# Altium PCB 2009_DFMUX_MEZZANINE_REV4_TIMEMAIL.PCBDOC (part 2 of 6)
Units mil, origin at the board's own origin, x right, y up, seen from the top; angles counter-clockwise.
Board outline 4922.86 x 3627.76 mil, 6 copper layers (Top Layer, Internal Plane 1, Mid-Layer 1, Internal Plane 2, Mid-Layer 2, Bottom Layer); 519 components, 606 nets, 2175 pads, 757 vias.
Unrouted connection lines stored in the file: 148.
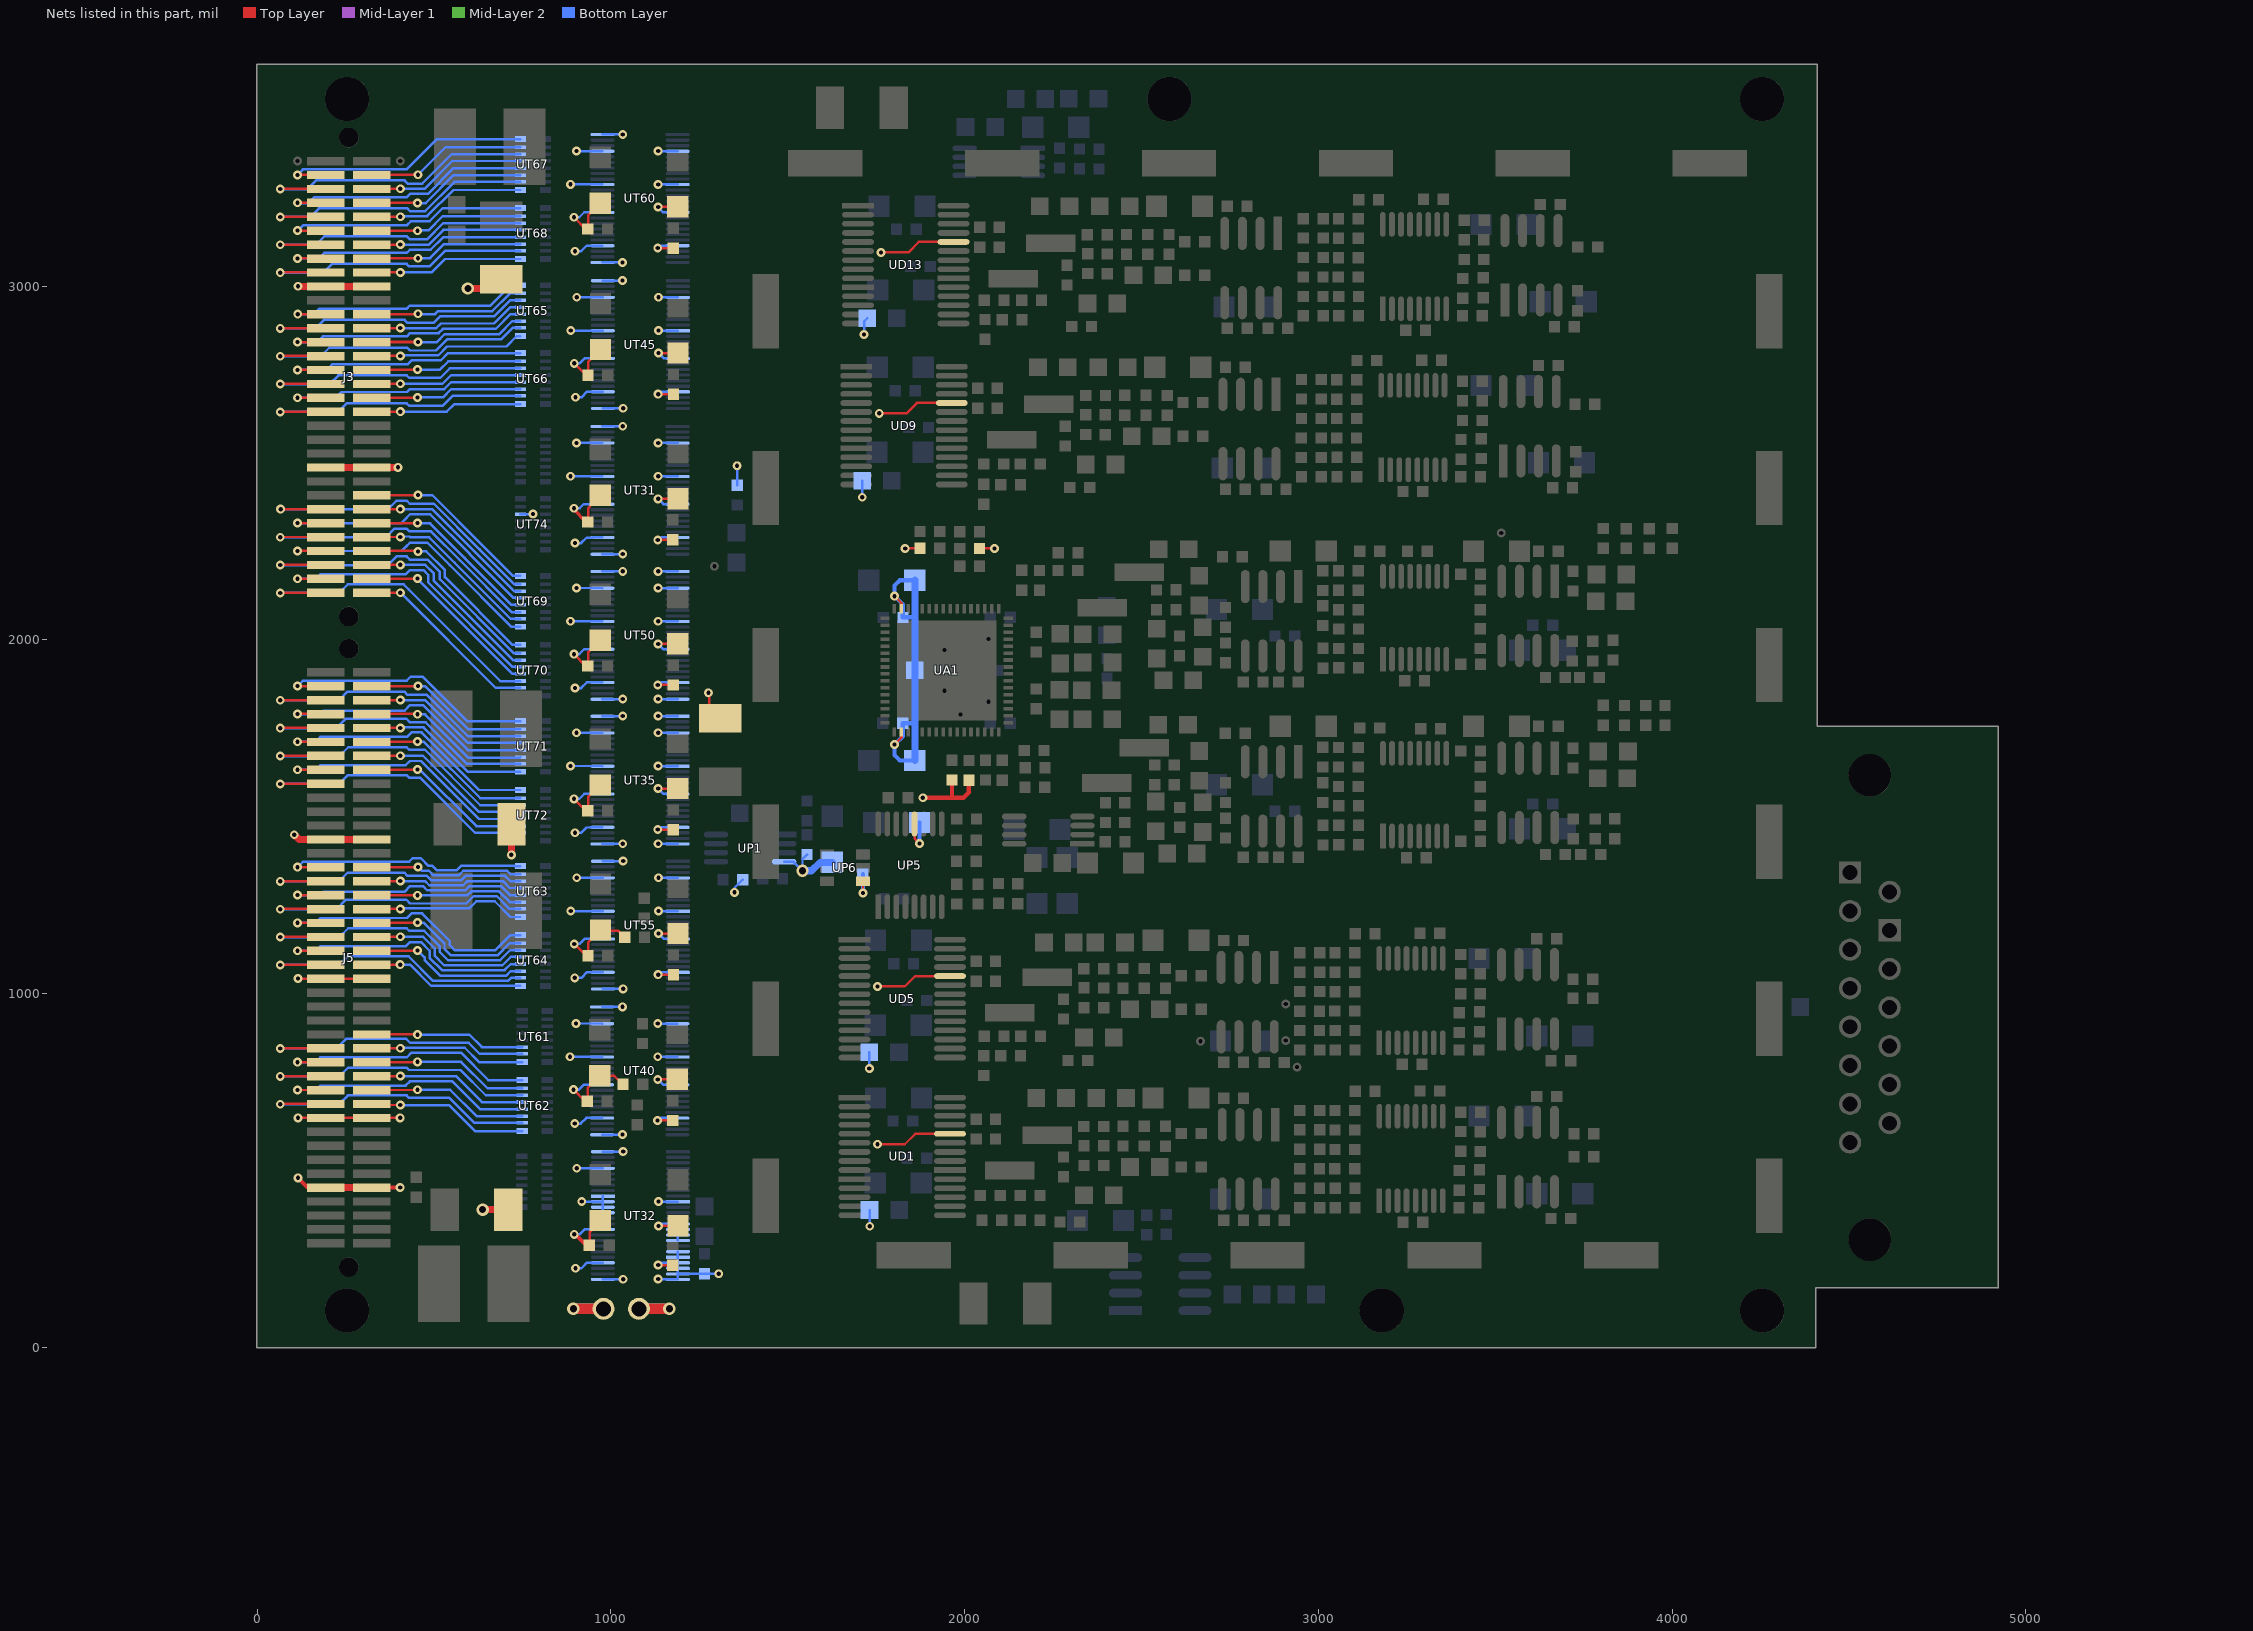
[diagram p6: the nets of this part, all layers, seen from the top]

## Via types
v1: diameter 25, hole 12, Top Layer to Bottom Layer, 692 vias
v2: diameter 40, hole 20, Top Layer to Bottom Layer, 39 vias
v3: diameter 35, hole 20, Top Layer to Bottom Layer, 23 vias
v4: diameter 22, hole 12, Top Layer to Bottom Layer, 3 vias

## Nets (pads, with @x,y where several pads share a name; then routed paths per layer and width w, separated by ;. In a path a pad name is that pad's centre, name@x,y a point inside that pad or via, vN(x,y) a via of type N, cw(c..) or ccw(c..) an arc to the next point about the centre after c; other vN are vias at no path point) (continued)
COMB1_DATA5: J5.54 UT61.11 | length 439.7
  Top Layer w7: J5.54@324.55,884.83 452.67,884.83 v1(453.63,883.87)
  Bottom Layer w7: v1(453.63,883.87) 599.77,883.87 635.27,848.37 UT61.11@749.13,848.37
COMB1_DATA6: J5.55 UT61.10 | length 841.8
  Top Layer w7: v1(65.55,844.7) 66.32,845.47 J5.55@194.63,845.47
  Bottom Layer w7: v1(65.55,844.7) 224.47,844.7 251.63,871.87 421.63,871.87 432.63,860.87 597.77,860.87 629.27,829.37 UT61.10@749.13,829.37
COMB1_DATA7: J5.56 UT61.9 | length 441.9
  Top Layer w7: J5.56@324.55,845.47 v1(404.85,845.47)
  Bottom Layer w7: v1(404.85,845.47) 406.45,846.87 586.77,846.87 627.27,806.37 UT61.9@749.13,806.37
COMB1_DATA8: J5.57 UT62.16 | length 758.5
  Top Layer w7: v1(114.33,806.1) J5.57@194.63,806.1
  Bottom Layer w7: v1(114.33,806.1) 114.57,805.87 164.63,805.87 178.63,819.87 423.63,819.87 436.63,832.87 575.77,832.87 653.27,755.37 UT62.16@749.13,755.37
COMB1_DATA9: J5.58 UT62.15 | length 455.8
  Top Layer w7: J5.58@324.55,806.1 452.87,806.1 v1(453.63,806.87)
  Bottom Layer w7: v1(453.63,806.87) 576.77,806.87 651.27,732.37 UT62.15@749.13,732.37
COMB1_DATA10: J5.59 UT62.14 | length 855.8
  Top Layer w7: v1(65.55,765.97) 66.32,766.73 J5.59@194.63,766.73
  Bottom Layer w7: v1(65.55,765.97) 232.73,765.97 257.63,790.87 422.63,790.87 429.63,783.87 574.77,783.87 646.27,712.37 UT62.14@749.13,712.37
COMB1_DATA11: J5.60 UT62.13 | length 455
  Top Layer w7: J5.60@324.55,766.73 v1(404.85,766.73)
  Bottom Layer w7: v1(404.85,766.73) 561.9,766.73 635.27,693.37 UT62.13@749.13,693.37
COMB1_DATA12: J5.61 UT62.12 | length 757.8
  Top Layer w7: v1(114.33,727.37) J5.61@194.63,727.37
  Bottom Layer w7: v1(114.33,727.37) 166.13,727.37 178.63,739.87 419.63,739.87 431.63,751.87 551.77,751.87 630.27,673.37 UT62.12@749.13,673.37
COMB1_DATA13: J5.62 UT62.11 | length 455.9
  Top Layer w7: J5.62@324.55,727.37 452.87,727.37 v1(453.63,728.13)
  Bottom Layer w7: v1(453.63,728.13) 545.5,728.13 620.27,653.37 UT62.11@749.13,653.37
COMB1_DATA14: J5.63 UT62.10 | length 855.3
  Top Layer w7: v1(65.55,687.23) 66.32,688 J5.63@194.63,688
  Bottom Layer w7: v1(65.55,687.23) 232,687.23 256.63,711.87 422.63,711.87 429.63,704.87 543.77,704.87 614.27,634.37 UT62.10@749.13,634.37
COMB1_DATA15: J5.64 UT62.9 | length 455
  Top Layer w7: J5.64@324.55,688 v1(404.85,684.73)
  Bottom Layer w7: v1(404.85,684.73) 542.9,684.73 616.27,611.37 UT62.9@749.13,611.37
COMB2_DATA0: J5.29 UT63.16 | length 740.4
  Top Layer w7: v1(114.33,1357.23) J5.29@194.63,1357.23
  Bottom Layer w7: v1(114.33,1357.23) 129.63,1372.53 429.8,1372.53 439.63,1382.37 463.27,1382.37 484.63,1361 495.63,1361 508.63,1348 563.63,1348 576.63,1361 727.63,1361 728.27,1360.37 UT63.16@744.13,1360.37
COMB2_DATA1: J5.30 UT63.15 | length 438.8
  Top Layer w7: J5.30@324.55,1357.23 453.33,1357.23 453.63,1357.53 v1(454.63,1357.53)
  Bottom Layer w7: v1(454.63,1357.53) 455.1,1357.53 465.63,1347 485.63,1347 498.63,1334 569.63,1334 582.63,1347 706.63,1347 716.27,1337.37 UT63.15@744.13,1337.37
COMB2_DATA2: J5.31 UT63.14 | length 838.5
  Top Layer w7: v1(65.55,1317.1) 66.32,1317.87 J5.31@194.63,1317.87
  Bottom Layer w7: v1(65.55,1317.1) 231.2,1317.1 255.63,1341.53 416.63,1341.53 425.63,1332.53 480.1,1332.53 492.63,1320 576.63,1320 589.17,1332.53 701.1,1332.53 716.27,1317.37 UT63.14@744.13,1317.37
COMB2_DATA3: J5.32 UT63.13 | length 437.5
  Top Layer w7: J5.32@324.55,1317.87 v1(404.85,1317.87)
  Bottom Layer w7: v1(404.85,1317.87) 474.77,1317.87 486.63,1306 582.63,1306 594.5,1317.87 694.63,1317.87 714.13,1298.37 UT63.13@744.13,1298.37
COMB2_DATA4: J5.33 UT63.12 | length 741.2
  Top Layer w7: v1(114.33,1278.5) J5.33@194.63,1278.5
  Bottom Layer w7: v1(114.33,1278.5) 115.3,1277.53 176.63,1277.53 186.63,1287.53 416.63,1287.53 432.63,1303.53 469.1,1303.53 480.63,1292 588.63,1292 600.17,1303.53 689.1,1303.53 714.27,1278.37 UT63.12@744.13,1278.37
COMB2_DATA5: J5.34 UT63.11 | length 437.4
  Top Layer w7: J5.34@324.55,1278.5 452.67,1278.5 v1(453.63,1277.53)
  Bottom Layer w7: v1(453.63,1277.53) 454.1,1278 594.63,1278 605.63,1289 683.63,1289 714.27,1258.37 UT63.11@744.13,1258.37
COMB2_DATA6: J5.35 UT63.10 | length 847
  Top Layer w7: v1(65.55,1238.37) 66.32,1239.13 J5.35@194.63,1239.13
  Bottom Layer w7: v1(65.55,1238.37) 224.47,1238.37 251.63,1265.53 421.63,1265.53 432.63,1254.53 591.17,1254.53 611.63,1275 677.63,1275 713.27,1239.37 UT63.10@744.13,1239.37
COMB2_DATA7: J5.36 UT63.9 | length 447.1
  Top Layer w7: J5.36@324.55,1239.13 v1(404.85,1239.13)
  Bottom Layer w7: v1(404.85,1239.13) 406.45,1240.53 599.17,1240.53 619.63,1261 671.63,1261 716.27,1216.37 UT63.9@744.13,1216.37
COMB2_DATA8: J5.37 UT64.16 | length 789.1
  Top Layer w7: v1(114.33,1199.77) J5.37@194.63,1199.77
  Bottom Layer w7: v1(114.33,1199.77) 114.57,1199.53 164.63,1199.53 178.63,1213.53 423.63,1213.53 436.63,1226.53 466.1,1226.53 544.63,1148 544.63,1137 559.63,1122 672.63,1122 716,1165.37 UT64.16@744.13,1165.37
COMB2_DATA9: J5.38 UT64.15 | length 481.3
  Top Layer w7: J5.38@324.55,1199.77 452.87,1199.77 v1(453.63,1200.53)
  Bottom Layer w7: v1(453.63,1200.53) 470.1,1200.53 529.63,1141 529.63,1126 547.63,1108 679.63,1108 714,1142.37 UT64.15@744.13,1142.37
COMB2_DATA10: J5.39 UT64.14 | length 876.9
  Top Layer w7: v1(65.55,1159.63) 66.32,1160.4 J5.39@194.63,1160.4
  Bottom Layer w7: v1(65.55,1159.63) 232.73,1159.63 257.63,1184.53 422.63,1184.53 429.63,1177.53 472.1,1177.53 515.63,1134 515.63,1118 539.63,1094 686.63,1094 715,1122.37 UT64.14@744.13,1122.37
COMB2_DATA11: J5.40 UT64.13 | length 474.9
  Top Layer w7: J5.40@324.55,1160.4 v1(404.85,1160.4)
  Bottom Layer w7: v1(404.85,1160.4) 469.23,1160.4 501.63,1128 501.63,1107 528.63,1080 693.63,1080 717,1103.37 UT64.13@744.13,1103.37
COMB2_DATA12: J5.41 UT64.12 | length 772.1
  Top Layer w7: v1(114.33,1121.03) J5.41@194.63,1121.03
  Bottom Layer w7: v1(114.33,1121.03) 166.13,1121.03 178.63,1133.53 419.63,1133.53 431.63,1145.53 463.1,1145.53 487.63,1121 487.63,1101 522.63,1066 699.63,1066 717,1083.37 UT64.12@744.13,1083.37
COMB2_DATA13: J5.42 UT64.11 | length 459.3
  Top Layer w7: J5.42@324.55,1121.03 452.87,1121.03 v1(453.63,1121.8)
  Bottom Layer w7: v1(453.63,1121.8) 453.83,1121.8 473.63,1102 473.63,1095 518.63,1050 703.63,1050 717,1063.37 UT64.11@744.13,1063.37
COMB2_DATA14: J5.43 UT64.10 | length 850.5
  Top Layer w7: v1(65.55,1080.9) 66.32,1081.67 J5.43@194.63,1081.67
  Bottom Layer w7: v1(65.55,1080.9) 232,1080.9 256.63,1105.53 428.1,1105.53 497.63,1036 709.63,1036 718,1044.37 UT64.10@744.13,1044.37
COMB2_DATA15: J5.44 UT64.9 | length 444.6
  Top Layer w7: J5.44@324.55,1081.67 v1(404.33,1081.67)
  Bottom Layer w7: v1(404.33,1081.67) 431.97,1081.67 492.27,1021.37 UT64.9@744.13,1021.37
COMB3_DATA0: J3.23 UT65.16 | length 746.9
  Top Layer w7: v1(114.67,2920.4) J3.23@194.63,2920.4
  Bottom Layer w7: v1@112.03,2918 v1(114.67,2920.4) ; v1@114.7,2920.37 159.63,2920.37 175.63,2936.37 423.3,2936.37 431.3,2944.37 659.63,2944.37 718,3002.37 UT65.16@744.13,3002.37
COMB3_DATA1: J3.24 UT65.15 | length 446.8
  Top Layer w7: J3.24@324.55,2920.4 453.33,2920.4 v1@453.63,2920.7 ; v1@453.63,2920.7 454.63,2920.7 v1(454.63,2921.37) 453.63,2921.37 v1@453.63,2920.7
  Bottom Layer w7: v1(454.63,2921.37) 455.63,2920.37 502.63,2920.37 503.3,2920.7 511.6,2929 664.63,2929 715,2979.37 UT65.15@744.13,2979.37
COMB3_DATA2: J3.25 UT65.14 | length 847.9
  Top Layer w7: v1(65.55,2880.27) 66.32,2881.03 J3.25@194.63,2881.03
  Bottom Layer w7: v1(65.55,2880.27) 164.53,2880.27 188.63,2904.37 416.97,2904.37 425.63,2895.7 498.97,2895.7 517.27,2914 669.63,2914 715,2959.37 UT65.14@744.13,2959.37
COMB3_DATA3: J3.26 UT65.13 | length 444.2
  Top Layer w7: J3.26@324.55,2881.03 v1(404.85,2881.03)
  Bottom Layer w7: v1(404.85,2881.03) 506.3,2881.03 519.27,2894 669.63,2894 716,2940.37 UT65.13@744.13,2940.37
COMB3_DATA4: J3.27 UT65.12 | length 743.5
  Top Layer w7: v1(114.33,2841.67) J3.27@194.63,2841.67
  Bottom Layer w7: v1(114.33,2841.67) 115.3,2840.7 168.73,2840.7 185.73,2857.37 423.63,2857.37 432.63,2866.7 512.97,2866.7 525.27,2879 674.63,2879 716,2920.37 UT65.12@744.13,2920.37
COMB3_DATA5: J3.28 UT65.11 | length 576.5
  Top Layer w7: J3.28@324.55,2841.67 324.88,2842 v1(454.63,2842) 453.97,2841.67 J3.28@324.55,2841.67
  Bottom Layer w7: v1@454,2841.37 v1(454.63,2842) 453.97,2841.67 507.93,2841.67 530.27,2864 684.63,2864 721,2900.37 UT65.11@744.13,2900.37
COMB3_DATA6: J3.29 UT65.10 | length 847.2
  Top Layer w7: v1(65.55,2801.53) 66.32,2802.3 J3.29@194.63,2802.3
  Bottom Layer w7: v1(65.55,2801.53) 179.65,2801.53 203.82,2825.37 424.63,2825.37 432.63,2817.7 505.97,2817.7 537.27,2849 689.63,2849 722,2881.37 UT65.10@744.13,2881.37
COMB3_DATA7: J3.30 UT65.9 | length 442.8
  Top Layer w7: J3.30@324.55,2802.3 v1(404.85,2802.3)
  Bottom Layer w7: v1(404.85,2802.3) 406.45,2803.7 511.97,2803.7 537.27,2829 704.63,2829 734,2858.37 UT65.9@744.13,2858.37
COMB3_DATA8: J3.31 UT66.16 | length 729.8
  Top Layer w7: v1(114.33,2762.93) J3.31@194.63,2762.93
  Bottom Layer w7: v1(114.33,2762.93) 114.57,2762.7 195.97,2762.7 210.97,2777.37 211.97,2778.37 425.3,2778.37 436.63,2789.7 518.97,2789.7 539.63,2810.37 UT66.16@744.13,2810.37
COMB3_DATA9: J3.32 UT66.15 | length 429.7
  Top Layer w7: J3.32@324.55,2762.93 452.87,2762.93 v1(453.63,2763.7)
  Bottom Layer w7: v1(453.63,2763.7) 516.97,2763.7 540.63,2787.37 UT66.15@744.13,2787.37
COMB3_DATA10: J3.33 UT66.14 | length 831.8
  Top Layer w7: v1(65.55,2722.8) 66.32,2723.57 J3.33@194.63,2723.57
  Bottom Layer w7: v1(65.55,2722.8) 204.9,2722.8 229.8,2747.37 422.63,2747.37 429.63,2740.7 517.97,2740.7 544.63,2767.37 UT66.14@744.13,2767.37
COMB3_DATA11: J3.34 UT66.13 | length 429.9
  Top Layer w7: J3.34@324.55,2723.57 v1(404.85,2723.57)
  Bottom Layer w7: v1(404.85,2723.57) 523.83,2723.57 548.63,2748.37 UT66.13@744.13,2748.37
COMB3_DATA12: J3.35 UT66.12 | length 728.4
  Top Layer w7: v1(114.33,2684.2) J3.35@194.63,2684.2
  Bottom Layer w7: v1(114.33,2684.2) 222.3,2684.2 238.8,2700.37 423.63,2700.37 431.63,2708.7 528.97,2708.7 548.63,2728.37 UT66.12@744.13,2728.37
COMB3_DATA13: J3.36 UT66.11 | length 429.6
  Top Layer w7: J3.36@324.55,2684.2 452.87,2684.2 v1(453.63,2684.97)
  Bottom Layer w7: v1(453.63,2684.97) 525.23,2684.97 548.63,2708.37 UT66.11@744.13,2708.37
COMB3_DATA14: J3.37 UT66.10 | length 832.1
  Top Layer w7: v1(65.55,2644.07) 66.32,2644.83 J3.37@194.63,2644.83
  Bottom Layer w7: v1(65.55,2644.07) 228.15,2644.07 252.78,2668.37 422.63,2668.37 429.63,2661.7 524.97,2661.7 552.63,2689.37 UT66.10@744.13,2689.37
COMB3_DATA15: J3.38 UT66.9 | length 428.5
  Top Layer w7: J3.38@324.55,2644.83 v1(404.85,2644.83)
  Bottom Layer w7: v1(404.85,2644.83) 536.1,2644.83 557.63,2666.37 UT66.9@744.13,2666.37
COMB4_DATA0: J3.3 UT67.16 | length 752.1
  Top Layer w7: v1(114.33,3314.07) J3.3@194.63,3314.07
  Bottom Layer w7: v1(114.33,3314.07) 129.63,3329.37 422.63,3329.37 508.63,3415.37 UT67.16@744.13,3415.37
COMB4_DATA1: J3.4 UT67.15 | length 452
  Top Layer w7: J3.4@324.55,3314.07 453.33,3314.07 453.63,3314.37 v1(454.63,3314.37)
  Bottom Layer w7: v1(454.63,3314.37) 532.63,3392.37 UT67.15@744.13,3392.37
COMB4_DATA2: J3.5 UT67.14 | length 856.2
  Top Layer w7: v1(65.55,3273.93) 66.32,3274.7 J3.5@194.63,3274.7
  Bottom Layer w7: v1(65.55,3273.93) 142.2,3273.93 166.63,3298.37 416.63,3298.37 425.63,3289.37 466.63,3289.37 549.63,3372.37 UT67.14@744.13,3372.37
COMB4_DATA3: J3.6 UT67.13 | length 452.2
  Top Layer w7: J3.6@324.55,3274.7 v1(404.85,3274.7)
  Bottom Layer w7: v1(404.85,3274.7) 472.97,3274.7 551.63,3353.37 UT67.13@744.13,3353.37
COMB4_DATA4: J3.7 UT67.12 | length 751.5
  Top Layer w7: v1(114.33,3235.33) J3.7@194.63,3235.33
  Bottom Layer w7: v1(114.33,3235.33) 115.3,3234.37 145.63,3234.37 162.63,3251.37 423.63,3251.37 432.63,3260.37 482.63,3260.37 555.63,3333.37 UT67.12@744.13,3333.37
COMB4_DATA5: J3.8 UT67.11 | length 452.7
  Top Layer w7: J3.8@324.55,3235.33 452.67,3235.33 v1(453.63,3234.37)
  Bottom Layer w7: v1(453.63,3234.37) 476.63,3234.37 555.63,3313.37 UT67.11@744.13,3313.37
COMB4_DATA6: J3.9 UT67.10 | length 855.7
  Top Layer w7: v1(65.55,3195.2) 66.32,3195.97 J3.9@194.63,3195.97
  Bottom Layer w7: v1(65.55,3195.2) 150.47,3195.2 174.63,3219.37 424.63,3219.37 432.63,3211.37 474.63,3211.37 557.63,3294.37 UT67.10@744.13,3294.37
COMB4_DATA7: J3.10 UT67.9 | length 451
  Top Layer w7: J3.10@324.55,3195.97 v1(404.85,3195.97)
  Bottom Layer w7: v1(404.85,3195.97) 405.25,3196.37 405.85,3196.37 406.45,3197.37 480.63,3197.37 554.63,3271.37 UT67.9@744.13,3271.37
COMB4_DATA8: J3.11 UT68.16 | length 736.8
  Top Layer w7: v1(114.33,3156.6) J3.11@194.63,3156.6
  Bottom Layer w7: v1(114.33,3156.6) 114.57,3156.37 130.57,3172.37 423.83,3172.37 434.63,3183 487.63,3183 524.63,3220.37 UT68.16@744.13,3220.37
COMB4_DATA9: J3.12 UT68.15 | length 437.9
  Top Layer w7: J3.12@324.55,3156.6 454.03,3156.6 v1(453.63,3156)
  Bottom Layer w7: v1(453.63,3156) 454.03,3156.6 454.8,3157.37 484.63,3157.37 524.63,3197.37 UT68.15@744.13,3197.37
COMB4_DATA10: J3.13 UT68.14 | length 840.1
  Top Layer w7: v1(65.55,3116.47) 66.32,3117.23 J3.13@194.63,3117.23
  Bottom Layer w7: v1(65.55,3116.47) 165.73,3116.47 189.63,3140.37 423.63,3140.37 432,3132 480.27,3132 525.63,3177.37 UT68.14@744.13,3177.37
COMB4_DATA11: J3.14 UT68.13 | length 436.6
  Top Layer w7: J3.14@324.55,3117.23 v1(404.85,3117.23)
  Bottom Layer w7: v1(404.85,3117.23) 485.5,3117.23 526.63,3158.37 UT68.13@744.13,3158.37
COMB4_DATA12: J3.15 UT68.12 | length 735.2
  Top Layer w7: v1(114.33,3077.87) J3.15@194.63,3077.87
  Bottom Layer w7: v1(114.33,3077.87) 174.13,3077.87 189.63,3093.37 422.63,3093.37 431.63,3102.37 490.63,3102.37 526.63,3138.37 UT68.12@744.13,3138.37
COMB4_DATA13: J3.16 UT68.11 | length 568.7
  Top Layer w7: J3.16@324.55,3077.87 453.33,3077.87 453.83,3078.37 v1(454.63,3078.37) 453.63,3078.63 452.87,3077.87 J3.16@324.55,3077.87
  Bottom Layer w7: v1(454.63,3078.37) 453.63,3078.63 488.9,3078.63 528.63,3118.37 UT68.11@744.13,3118.37
COMB4_DATA14: J3.17 UT68.10 | length 839.3
  Top Layer w7: v1(65.55,3037.73) 66.32,3038.5 J3.17@194.63,3038.5
  Bottom Layer w7: v1(65.55,3037.73) 187,3037.73 211.63,3062.37 422.63,3062.37 429.63,3055.37 487.63,3055.37 531.63,3099.37 UT68.10@744.13,3099.37
COMB4_DATA15: J3.18 UT68.9 | length 435.3
  Top Layer w7: J3.18@324.55,3038.5 v1(404.85,3038.5)
  Bottom Layer w7: v1(404.85,3038.5) 492.77,3038.5 530.63,3076.37 UT68.9@744.13,3076.37
DEMODA_DATA0: J5.3 UT71.16 | length 773.3
  Top Layer w7: v1(114.33,1869) J5.3@194.63,1869
  Bottom Layer w7: v1(114.33,1869) 129.63,1884.3 422.63,1884.3 434.3,1895.97 468.03,1895.97 593.63,1770.37 UT71.16@744.13,1770.37
DEMODA_DATA1: J5.4 UT71.15 | length 470.2
  Top Layer w7: J5.4@324.55,1869 453.33,1869 453.63,1869.3 v1(454.63,1869.3)
  Bottom Layer w7: v1(454.63,1869.3) 474.7,1869.3 596.63,1747.37 UT71.15@744.13,1747.37
DEMODA_DATA2: J5.5 UT71.14 | length 870.3
  Top Layer w7: v1(65.55,1828.87) 66.32,1829.63 J5.5@194.63,1829.63
  Bottom Layer w7: v1(65.55,1828.87) 231.2,1828.87 255.63,1853.3 416.63,1853.3 425.63,1844.3 479.7,1844.3 596.63,1727.37 UT71.14@744.13,1727.37
DEMODA_DATA3: J5.6 UT71.13 | length 469.8
  Top Layer w7: J5.6@324.55,1829.63 v1(404.85,1829.63)
  Bottom Layer w7: v1(404.85,1829.63) 474.37,1829.63 595.63,1708.37 UT71.13@744.13,1708.37
DEMODA_DATA4: J5.7 UT71.12 | length 773.8
  Top Layer w7: v1(114.33,1790.27) J5.7@194.63,1790.27
  Bottom Layer w7: v1(114.33,1790.27) 115.3,1789.3 176.63,1789.3 186.63,1799.3 416.63,1799.3 432.63,1815.3 468.7,1815.3 595.63,1688.37 UT71.12@744.13,1688.37
DEMODA_DATA5: J5.8 UT71.11 | length 471.7
  Top Layer w7: J5.8@324.55,1790.27 452.67,1790.27 v1(453.63,1789.3)
  Bottom Layer w7: v1(453.63,1789.3) 474.7,1789.3 597.63,1666.37 742.13,1666.37 UT71.11@744.13,1668.37
DEMODA_DATA6: J5.9 UT71.10 | length 872.2
  Top Layer w7: v1(65.55,1750.13) 66.32,1750.9 J5.9@194.63,1750.9
  Bottom Layer w7: v1(65.55,1750.13) 224.47,1750.13 251.63,1777.3 421.63,1777.3 432.63,1766.3 476.7,1766.3 593.63,1649.37 UT71.10@744.13,1649.37
DEMODA_DATA7: J5.10 UT71.9 | length 472.3
  Top Layer w7: J5.10@324.55,1750.9 v1(404.85,1750.9)
  Bottom Layer w7: v1(404.85,1750.9) 406.45,1752.3 470.7,1752.3 596.63,1626.37 UT71.9@744.13,1626.37
DEMODA_DATA8: J5.11 UT72.16 | length 788.9
  Top Layer w7: v1(114.33,1711.53) J5.11@194.63,1711.53
  Bottom Layer w7: v1(114.33,1711.53) 114.57,1711.3 164.63,1711.3 178.63,1725.3 423.63,1725.3 436.63,1738.3 464.7,1738.3 627.63,1575.37 UT72.16@744.13,1575.37
DEMODA_DATA9: J5.12 UT72.15 | length 486.1
  Top Layer w7: J5.12@324.55,1711.53 452.87,1711.53 v1(453.63,1712.3)
  Bottom Layer w7: v1(453.63,1712.3) 470.7,1712.3 630.63,1552.37 UT72.15@744.13,1552.37
DEMODA_DATA10: J5.13 UT72.14 | length 886.2
  Top Layer w7: v1(65.55,1671.4) 66.32,1672.17 J5.13@194.63,1672.17
  Bottom Layer w7: v1(65.55,1671.4) 232.73,1671.4 257.63,1696.3 422.63,1696.3 429.63,1689.3 473.7,1689.3 630.63,1532.37 UT72.14@744.13,1532.37
DEMODA_DATA11: J5.14 UT72.13 | length 485.4
  Top Layer w7: J5.14@324.55,1672.17 v1(404.85,1672.17)
  Bottom Layer w7: v1(404.85,1672.17) 468.83,1672.17 627.63,1513.37 UT72.13@744.13,1513.37
DEMODA_DATA12: J5.15 UT72.12 | length 788.2
  Top Layer w7: v1(114.33,1632.8) J5.15@194.63,1632.8
  Bottom Layer w7: v1(114.33,1632.8) 166.13,1632.8 178.63,1645.3 419.63,1645.3 431.63,1657.3 463.7,1657.3 627.63,1493.37 UT72.12@744.13,1493.37
DEMODA_DATA13: J5.16 UT72.11 | length 486.3
  Top Layer w7: J5.16@324.55,1632.8 452.87,1632.8 v1(453.63,1633.57)
  Bottom Layer w7: v1(453.63,1633.57) 459.43,1633.57 619.63,1473.37 UT72.11@744.13,1473.37
DEMODA_DATA14: J5.17 UT72.10 | length 885.7
  Top Layer w7: v1(65.55,1592.67) 66.32,1593.43 J5.17@194.63,1593.43
  Bottom Layer w7: v1(65.55,1592.67) 232,1592.67 256.63,1617.3 422.63,1617.3 429.63,1610.3 460.7,1610.3 616.63,1454.37 UT72.10@744.13,1454.37
DEMODB_DATA0: J3.50 UT69.16 | length 514.6
  Top Layer w7: J3.50@324.55,2408.63 453.33,2408.63 453.63,2408.93 v1(454.63,2408.93)
  Bottom Layer w7: v1(454.63,2408.93) 495.07,2408.93 642.63,2261.37 642.63,2261 723.27,2180.37 UT69.16@744.13,2180.37
DEMODB_DATA1: J3.51 UT69.15 | length 915.1
  Top Layer w7: v1@64.9,2369.27 v1(66.55,2369.27) J3.51@194.63,2369.27
  Bottom Layer w7: v1(66.55,2369.27) 369.98,2369.27 393.62,2393.13 422.63,2393.13 431.4,2384.37 499.63,2384.37 628.63,2255.37 628.63,2255 726.27,2157.37 UT69.15@744.13,2157.37
DEMODB_DATA2: J3.52 UT69.14 | length 515.9
  Top Layer w7: J3.52@324.55,2369.27 v1(404.85,2369.27)
  Bottom Layer w7: v1(404.85,2369.27) 494.73,2369.27 614.63,2249.37 614.63,2249 726.27,2137.37 UT69.14@744.13,2137.37
DEMODB_DATA3: J3.53 UT69.13 | length 819.5
  Top Layer w7: v1(114.33,2329.9) J3.53@194.63,2329.9
  Bottom Layer w7: v1(114.33,2329.9) 115.3,2328.93 406.57,2328.93 416.57,2338.93 416.63,2338.93 432.63,2354.93 489.07,2354.93 600.63,2243.37 600.63,2243 725.27,2118.37 UT69.13@744.13,2118.37
DEMODB_DATA4: J3.54 UT69.12 | length 516.1
  Top Layer w7: J3.54@324.55,2329.9 453.17,2329.9 v1(453.63,2330.37)
  Bottom Layer w7: v1(453.63,2330.37) 455.07,2328.93 489.07,2328.93 586.63,2231.37 586.63,2231 719.27,2098.37 UT69.12@744.13,2098.37
DEMODB_DATA5: J3.55 UT69.11 | length 916.2
  Top Layer w7: v1(65.55,2289.77) 66.32,2290.53 J3.55@194.63,2290.53
  Bottom Layer w7: v1(65.55,2289.77) 363.63,2289.77 388.27,2314.4 422.63,2314.4 430.67,2306.37 491.63,2306.37 572.63,2225.37 572.63,2225 719.27,2078.37 UT69.11@744.13,2078.37
DEMODB_DATA6: J3.56 UT69.10 | length 516.9
  Top Layer w7: J3.56@324.55,2290.53 v1(404.85,2290.53)
  Bottom Layer w7: v1(404.85,2290.53) 405.25,2290.93 405.85,2290.93 406.45,2291.93 431.07,2291.93 433.63,2289.37 486.63,2289.37 558.63,2217.37 558.63,2217 716.27,2059.37 UT69.10@744.13,2059.37
DEMODB_DATA7: J3.57 UT69.9 | length 818.8
  Top Layer w7: v1(114.33,2251.17) J3.57@194.63,2251.17
  Bottom Layer w7: v1(114.33,2251.17) 114.57,2250.93 408.57,2250.93 422.57,2264.93 422.8,2264.93 431.8,2274.37 481.63,2274.37 544.63,2211.37 544.63,2211 719.27,2036.37 UT69.9@744.13,2036.37
DEMODB_DATA8: J3.58 UT70.16 | length 542.6
  Top Layer w7: J3.58@324.55,2251.17 452.87,2251.17 v1@454.63,2249.4
  Bottom Layer w7: v1(454.63,2249.37) 455.2,2250.37 477.63,2250.37 530.63,2197.37 530.63,2177 722.27,1985.37 UT70.16@744.13,1985.37
DEMODB_DATA9: J3.59 UT70.15 | length 943.4
  Top Layer w7: v1(65.55,2211.03) 66.32,2211.8 J3.59@194.63,2211.8
  Bottom Layer w7: v1(65.55,2211.03) 369.67,2211.03 394.3,2235.67 422.63,2235.67 431.63,2226.37 481.63,2226.37 516.63,2191.37 516.63,2171 725.27,1962.37 UT70.15@744.13,1962.37
DEMODB_DATA10: J3.60 UT70.14 | length 545.9
  Top Layer w7: J3.60@324.55,2211.8 v1(404.85,2211.8)
  Mid-Layer 1 w7: v1@403.28,2213.37 v1(404.85,2211.8)
  Bottom Layer w7: v1(404.85,2211.8) 475.2,2211.8 498.63,2188.37 498.63,2167 723.27,1942.37 UT70.14@744.13,1942.37
DEMODB_DATA11: J3.61 UT70.13 | length 846.1
  Top Layer w7: v1(114.33,2172.43) J3.61@194.63,2172.43
  Bottom Layer w7: v1(114.33,2172.43) 166.13,2172.43 178.63,2184.93 419.63,2184.93 431.63,2196.93 470.07,2196.93 483.63,2183.37 483.63,2162 722.27,1923.37 UT70.13@744.13,1923.37
DEMODB_DATA12: J3.62 UT70.12 | length 532.5
  Top Layer w7: J3.62@324.55,2172.43 452.87,2172.43 v1(453.63,2173.2)
  Bottom Layer w7: v1(453.63,2173.2) 453.8,2173.2 453.8,2171.83 722.27,1903.37 UT70.12@744.13,1903.37
DEMODB_DATA13: J3.63 UT70.11 | length 931.7
  Top Layer w7: v1(65.55,2132.3) 66.32,2133.07 J3.63@194.63,2133.07
  Bottom Layer w7: v1(65.55,2132.3) 232,2132.3 256.63,2156.93 414.07,2156.93 428.63,2142.37 428.63,2142 687.27,1883.37 UT70.11@744.13,1883.37
DEMODB_DATA14: J3.64 UT70.10 | length 531.1
  Top Layer w7: J3.64@324.55,2133.07 v1(404.85,2133.07)
  Bottom Layer w7: v1(404.85,2133.07) 405.93,2133.07 407.63,2131.37 407.63,2131 674.27,1864.37 UT70.10@744.13,1864.37
GND_DIG: CA7.1 CA25.2 CA33.1 CA44.2 CA45.2 CP3.1 CP6.2 CP7.2 CP21.2 CP22.1 CT27.2 CT28.1 CT31.2 CT32.1 CT33.2 CT34.1 CT37.2 CT38.1 CT41.2 CT42.1 CT45.2 CT46.1 CT49.2 CT50.1 CT53.2 CT54.1 J1.2 pad.1@1275.63,1850 pad.1@1304.63,208 pad.1@1356.63,2492 RA3.1 RA5.1 RA54.2 RP6.2 RP8.2 RP35.2 RP36.1 RP37.1 RP38.1 RP39.1 RP40.1 UA1.31 UA1.50 UD1.24 UD5.24 UD9.24 UD13.24 UP1.4 UP5.12 UP6.1 UT31.4 UT31.10 UT31.15 UT31.21 UT31.25 UT31.48 UT32.10 UT32.14 UT32.15 UT32.16 UT32.17 UT32.19 UT32.20 UT32.21 UT32.22 UT32.23 UT32.24 UT32.25 UT32.48 UT35.1 UT35.4 UT35.10 UT35.15 UT35.21 UT35.24 UT35.25 UT35.48 UT40.4 UT40.10 UT40.15 UT40.21 UT40.25 UT40.48 UT45.4 UT45.10 UT45.15 UT45.21 UT45.25 UT45.48 UT50.1 UT50.4 UT50.10 UT50.15 UT50.21 UT50.24 UT50.25 UT50.48 UT55.4 UT55.10 UT55.15 UT55.21 UT55.25 UT55.48 UT60.4 UT60.10 UT60.15 UT60.21 UT60.25 UT60.48 | length 9243
  Top Layer w7: v1(1131.63,641.37) CT38.1@1174.63,641.37 ; v1(1132.63,1463.37) CT34.1@1175.63,1463.37 ; v1(1132.63,3107.37) CT54.1@1175.63,3107.37 ; v1(1133.63,1053.37) CT50.1@1176.63,1053.37 ; v1(1134.63,343) 1134.27,343.37 CT31.2@1189.63,343.37 ; pad.1@1275.63,1850 1277.63,1852 1277.63,1815 1309.63,1783 CP6.2@1309.63,1779 ; v1(1753.63,574) 1830.77,574 1860.2,603.43 UD1.24@1959.03,603.43 ; v1(1753.63,1020) 1830.77,1020 1860.2,1049.43 UD5.24@1959.03,1049.43 ; v1(1758.63,2640) 1835.77,2640 1865.2,2669.43 ; v1(1763.63,3095) 1840.77,3095 1870.2,3124.43 UD13.24@1969.03,3124.43 ; v1(1831.77,2258.37) RA5.1@1874.27,2258.37 ; UP5.12@1858.3,1480.05 1858.3,1438.7 v1(1872.63,1424.37) ; RA3.1@2041.77,2258.37 v1(2084.27,2258.37) ; 1865.2,2669.43 1964.03,2669.43 1865.2,2669.43 ; v1(1132.63,757.37) 1187.63,757.37 v1(1132.63,757.37) ; v1(1132.63,1872.37) 1175.63,1872.37 v1(1132.63,1872.37) ; v1(1132.63,2282.37) 1174.63,2283.37 v1(1132.63,2282.37) ; v1(1133.63,232.37) 1174.63,232.37 v1(1133.63,232.37) ; v1(1133.63,1579.37) 1188.63,1579.37 v1(1133.63,1579.37) ; v1(1133.63,1988.37) 1188.63,1988.37 v1(1133.63,1988.37) ; v1(1133.63,2398.37) 1189.63,2398.37 v1(1133.63,2398.37) ; v1(1133.63,2694.37) 1176.63,2694.37 v1(1133.63,2694.37) ; v1(1133.63,3223.37) 1188.63,3223.37 v1(1133.63,3223.37) ; v1(1134.63,1169.37) 1189.63,1169.37 v1(1134.63,1169.37) ; v1(1134.63,2810.37) 1189.63,2810.37 v1(1134.63,2810.37) ; v1(1712.63,1284.37) 1712.63,1318.37 v1(1712.63,1284.37)
  Top Layer w8: v1(1801.77,1703.91) 1821.18,1723.32 UA1.50@1821.18,1739.43 ; v1(1801.77,2123.37) 1821.18,2103.95 UA1.31@1821.18,2087.85
  Top Layer w12: v1(1881.77,1553.37) 1996.77,1553.37 2011.77,1568.37 CA33.1@2011.77,1603.37 ; 1964.27,1553.37 RA54.2@1964.27,1603.37
  Top Layer w30: J1.2@1079.63,109 v3(1165.3,109)
  Mid-Layer 1 w30: J1.2@1079.63,109 v3(1165.3,109)
  Mid-Layer 2 w30: J1.2@1079.63,109 v3(1165.3,109)
  Bottom Layer w7: UT35.25@976.03,1423.27 v1(1033.63,1423.27) ; UT35.48@976.03,1784.37 v1(1033.63,1784.37) ; UT50.25@976.03,1832.27 v1(1033.63,1832.27) ; UT50.48@976.03,2193.37 v1(1033.63,2193.37) ; UT31.25@976.03,2242.27 v1(1033.63,2242.27) ; UT31.48@976.03,2603.37 v1(1033.63,2603.37) ; UT60.48@976.03,3428.37 v1(1033.63,3428.37) ; UT32.25@977.03,192.27 v1(1034.63,192.27) ; UT55.48@977.03,1374.37 v1(1034.63,1374.37) ; UT45.48@977.03,3015.37 v1(1032.63,3015.37) ; v1(1034.63,553.37) v1@1032.63,553.37 ; v1@1131.03,1784.37 v1(1133.63,1784.37) ; v1@1131.03,2193.37 v1(1133.63,2193.37) ; v1(1131.63,641.37) 1134.63,641.37 1141.63,648.37 UT40.21@1187.63,648.37 ; v1(1132.63,757.37) 1147.43,742.57 UT40.15@1187.63,742.57 ; v1(1132.63,821.17) v1@1132.73,821.07 ; v1(1132.63,915.37) 1132.73,915.27 UT40.4@1187.63,915.27 ; v1(1132.63,1463.37) 1135.63,1463.37 1142.63,1470.37 UT35.21@1188.63,1470.37 ; v1(1132.63,1872.37) 1135.63,1872.37 1142.63,1879.37 UT50.21@1188.63,1879.37 ; v1(1132.63,2282.37) 1135.63,2282.37 1142.63,2289.37 UT31.21@1188.63,2289.37 ; v1(1132.63,3107.37) 1135.63,3107.37 1142.63,3114.37 UT60.21@1188.63,3114.37 ; v1(1133.63,232.37) 1136.63,232.37 1143.63,239.37 UT32.21@1189.63,239.37 ; v1(1133.63,1053.37) 1136.63,1053.37 1143.63,1060.37 UT55.21@1189.63,1060.37 ; v1(1133.63,1579.37) 1148.43,1564.57 UT35.15@1188.63,1564.57 ; v1(1133.63,1737.37) v1@1133.73,1737.27 ; v1(1133.63,1988.37) 1133.63,1987.77 1147.83,1973.57 UT50.15@1188.63,1973.57 ; v1(1133.63,2146.37) v1@1133.73,2146.27 ; v1(1133.63,2398.37) 1148.43,2383.57 UT31.15@1188.63,2383.57 ; v1(1133.63,2462.17) v1@1133.73,2462.07 ; v1(1133.63,2694.37) 1136.63,2694.37 1143.63,2701.37 UT45.21@1189.63,2701.37 ; v1(1133.63,3223.37) 1133.63,3221.77 1146.83,3208.57 UT60.15@1188.63,3208.57 ; v1(1134.63,343) v1@1140.9,349.27 ; v1@1134.63,412.17 v1(1134.73,412.07) UT32.10@1189.63,412.07 ; v1(1134.63,1169.37) 1135.03,1169.37 1149.83,1154.57 UT55.15@1189.63,1154.57 ; v1(1134.63,1233.17) v1@1134.73,1233.07 ; v1(1134.63,1327.37) 1134.73,1327.27 UT55.4@1189.63,1327.27 ; v1(1134.63,2810.37) 1135.03,2810.37 1149.83,2795.57 UT45.15@1189.63,2795.57 ; UT31.4@1188.63,2556.27 v1@1133.73,2556.27 ; UT60.4@1188.63,3381.27 v1@1133.73,3381.27 ; UT32.24@1189.63,193 1189.63,207.97 1189.63,223.67 UT32.21@1189.63,239.37 ; UT32.23@1189.63,208 1264.63,208 pad.1@1304.63,208 ; UT32.19@1189.63,270.77 1189.63,255.07 UT32.21@1189.63,239.37 ; UT32.17@1189.63,302.17 1189.63,317.87 1189.63,333.57 1189.63,343.37 UT32.14@1189.63,349.27 ; UT45.4@1189.63,2968.27 v1@1134.73,2968.27 ; v1(1349.63,1286) 1349.63,1299 CP3.1@1372.63,1322 ; RP8.2@1356.63,2437 pad.1@1356.63,2492 ; UP1.4@1489.63,1372.2 1516.43,1372.2 v3(1541.63,1347) ; RP6.2@1554.63,1393 RP6.2@1541.63,1380 ; v1(1710.63,2403) RP37.1@1710.63,2449 ; RP36.1@1724.63,2909 1715.63,2900 v1(1715.63,2863) ; v1(1731.63,342) RP40.1@1731.63,388 ; v1@1031.63,3066.37 v1(1032.63,3066.37) v1@1031.63,3066.37 ; v1@1031.63,3066.37 v1@1032.53,3067.27 ; v1@1032.53,3067.27 976.03,3067.27 v1@1032.53,3067.27 ; v1@1032.63,553.37 977.03,553.37 v1@1032.63,553.37 ; v1@1132.73,821.07 1187.63,821.07 v1@1132.73,821.07 ; v1(1133.63,1784.37) 1188.63,1784.37 v1(1133.63,1784.37) ; v1(1133.63,2193.37) 1188.63,2193.37 v1(1133.63,2193.37) ; v1@1133.73,1643.07 v1(1133.63,1643.17) v1@1133.73,1643.07 ; v1@1133.73,1643.07 1188.63,1643.07 v1@1133.73,1643.07 ; v1@1133.73,1737.27 1188.63,1737.27 v1@1133.73,1737.27 ; v1@1133.73,2052.07 v1(1133.63,2052.17) v1@1133.73,2052.07 ; v1@1133.73,2052.07 1188.63,2052.07 v1@1133.73,2052.07 ; v1@1133.73,2146.27 1188.63,2146.27 v1@1133.73,2146.27 ; v1@1133.73,2462.07 1188.63,2462.07 v1@1133.73,2462.07 ; v1@1133.73,2556.27 v1(1133.63,2556.37) v1@1133.73,2556.27 ; v1@1133.73,3287.07 v1(1133.63,3287.17) v1@1133.73,3287.07 ; v1@1133.73,3287.07 1188.63,3287.07 v1@1133.73,3287.07 ; v1@1133.73,3381.27 v1(1133.63,3381.37) v1@1133.73,3381.27 ; v1@1134.73,1233.07 1189.63,1233.07 v1@1134.73,1233.07 ; v1@1134.73,2874.07 v1(1134.63,2874.17) v1@1134.73,2874.07 ; v1@1134.73,2874.07 1189.63,2874.07 v1@1134.73,2874.07 ; v1@1134.73,2968.27 v1(1134.63,2968.37) v1@1134.73,2968.27 ; v1@1140.9,349.27 UT32.14@1189.63,349.27 ; v1@1140.9,349.27 UT32.14@1189.63,349.27 ; v3(1541.63,1347) RP6.2@1541.63,1380 ; v3(1541.63,1347) RP6.2@1541.63,1380 ; v1(1715.63,2863) 1714.63,2864 v1(1715.63,2863) ; UT40.25@975.03,601.27 v1(1032.63,601.27) UT40.25@975.03,601.27 ; UT40.48@975.03,962.37 v1(1032.63,962.37) UT40.48@975.03,962.37 ; UT55.25@977.03,1013.27 v1(1034.63,1013.27) UT55.25@977.03,1013.27 ; UT45.25@977.03,2654.27 v1(1034.63,2654.27) UT45.25@977.03,2654.27 ; v1(1133.63,1423.27) 1188.63,1423.27 v1(1133.63,1423.27) ; v1(1133.63,1832.27) 1188.63,1832.27 v1(1133.63,1832.27) ; v1@1134.63,192.27 1189.63,192.27 v1@1134.63,192.27 ; v1(1730.63,788) 1730.63,834 v1(1730.63,788)
  Bottom Layer w12: v1(1712.63,1284.37) CP22.1@1712.63,1337.37 ; CA45.2@1859.27,1658.91 1816.77,1658.91 1801.77,1673.91 v1(1801.77,1703.91) 1825.27,1727.41 1825.27,1763.91 1859.27,1763.91 ; 1859.27,2063.37 1825.27,2063.37 1825.27,2099.87 v1(1801.77,2123.37) 1801.77,2153.37 1816.77,2168.37 CA44.2@1859.27,2168.37 ; v1(1872.63,1424.37) CP21.2@1872.63,1483.37
  Bottom Layer w20: v3(1541.63,1347) 1566.85,1347 1590.65,1370.8 CP7.2@1625.93,1370.8 ; CA45.2@1859.27,1658.91 1859.27,1913.37 CA44.2@1859.27,2168.37
  Bottom Layer w30: J1.2@1079.63,109 v3(1165.3,109)
  other v1: 1133.63,192.93
GND_EARTH: CP1.1 CP2.1 CP5.2 CP12.2 CP17.1 CT25.2 CT26.1 CT29.2 CT30.1 CT35.2 CT36.1 CT39.2 CT40.1 CT43.2 CT44.1 CT47.2 CT48.1 CT51.2 CT52.1 CT55.2 CT56.1 J1.1 J3.19 J3.20 J3.45 J3.46 J5.25 J5.26 J5.45 J5.46 J5.65 J5.66 J5.75 J5.76 UT31.28 UT31.34 UT31.39 UT31.45 UT32.28 UT32.34 UT32.37 UT32.38 UT32.39 UT32.40 UT32.45 UT35.28 UT35.34 UT35.39 UT35.45 UT40.28 UT40.34 UT40.39 UT40.45 UT45.28 UT45.34 UT45.39 UT45.45 UT50.28 UT50.34 UT50.39 UT50.45 UT55.28 UT55.34 UT55.39 UT55.45 UT60.28 UT60.34 UT60.39 UT60.45 UT74.14 | length 7540.1
  Top Layer w7: v1(115.87,1042.3) 194.63,1042.3 J5.46@324.55,1042.3 ; v1@403.55,452.6 v1(404.35,451.8) ; v1@403.55,649.43 v1(404.35,648.63) 324.55,648.63 J5.65@194.63,648.63 ; CP5.2@718.63,1477.37 CP5.2@719.63,1478.37 ; v1(895.63,3194.37) 928.63,3161.37 934.63,3161.37 935.63,3162.37 935.63,3199.37 CT55.2@969.63,3233.37 ; CT29.2@969.63,358.37 940.63,326.37 940.63,289.37 CT30.1@939.63,288.37 ; CT35.2@969.63,1589.37 935.63,1555.37 935.63,1518.37 934.63,1517.37 CT36.1@928.63,1517.37 ; CT47.2@969.63,1998.37 935.63,1964.37 935.63,1927.37 934.63,1926.37 CT48.1@928.63,1926.37 ; CT25.2@969.63,2408.37 935.63,2371.37 935.63,2334.37 CT26.1@934.63,2333.37 ; CT43.2@970.63,2820.37 936.63,2786.37 936.63,2749.37 935.63,2748.37 CT44.1@929.63,2748.37 ; CP1.1@1034.63,744 1032.63,744 1009.63,767 969,767 968.63,767.37 934.63,733.37 934.63,696.37 933.63,695.37 CT40.1@927.63,695.37 ; CP2.1@1039.63,1159 1038.63,1159 1019.63,1178 972,1178 970.63,1179.37 936.63,1145.37 936.63,1108.37 935.63,1107.37 CT52.1@929.63,1107.37 ; J5.65@194.63,648.63 v1(115.87,648.63) J5.65@194.63,648.63 ; CP12.2@689.63,3018 664.63,2993 CP12.2@689.63,3018 ; CP12.2@689.63,3018 689.63,3019 CP12.2@689.63,3018 ; v1@895.63,2369.37 v1(895.63,2372) v1@895.63,2369.37 ; v1@895.63,2369.37 CT26.1@928.63,2336.37 ; v1@895.63,2369.37 895.63,2366.37 928.63,2333.37 CT26.1@934.63,2333.37 ; CT40.1@927.63,695.37 v1(894.63,728.37) CT40.1@927.63,695.37 ; CT36.1@928.63,1517.37 v1(895.63,1550.37) CT36.1@928.63,1517.37 ; CT48.1@928.63,1926.37 v1(895.63,1959.37) CT48.1@928.63,1926.37 ; CT26.1@928.63,2336.37 CT26.1@934.63,2333.37 ; CT26.1@928.63,2336.37 CT26.1@934.63,2333.37 ; CT52.1@929.63,1107.37 v1(896.63,1140.37) CT52.1@929.63,1107.37 ; CT44.1@929.63,2748.37 v1(896.63,2781.37) CT44.1@929.63,2748.37 ; CT30.1@939.63,288.37 933.63,288.37 900.63,321.37 v1(896.63,319.37) 929.63,286.37 CT30.1@939.63,288.37
  Top Layer w12: v1(115.6,479) 142.8,451.8 J5.75@194.63,451.8 ; J5.76@324.55,451.8 v1(404.35,451.8) J5.76@324.55,451.8
  Top Layer w20: v1(105,1449) 118.03,1435.97 194.63,1435.97 J5.26@324.55,1435.97 ; v1(115.87,2999.13) 194.63,2999.13 J3.20@324.55,2999.13 ; J5.75@194.63,451.8 J5.76@324.55,451.8 ; J3.45@194.63,2487.37 324.55,2487.37 v1(398.37,2487.37) ; v3(637.63,389) CP17.1@709.63,389 ; v1(718.63,1392) CP5.2@718.63,1477.37 ; v3(595.63,2993) 664.63,2993 v3(595.63,2993)
  Top Layer w30: v3(893.97,109) J1.1@979.63,109
  Mid-Layer 1 w30: v3(893.97,109) J1.1@979.63,109
  Mid-Layer 2 w30: v3(893.97,109) J1.1@979.63,109
  Bottom Layer w7: v1(884.63,821.37) 888.63,821.37 888.83,821.17 904.63,821.17 ; v1(885.63,2052.37) 889.63,2052.37 889.83,2052.17 905.63,2052.17 ; v1(885.63,2462.37) 889.63,2462.37 889.83,2462.17 905.63,2462.17 ; v1(886.63,1233.37) 890.63,1233.37 890.83,1233.17 906.63,1233.17 ; v1(886.63,2874.37) 890.63,2874.37 890.83,2874.17 906.63,2874.17 ; v1(894.63,728.37) 909.63,728.37 923.83,742.57 UT40.34@975.03,742.57 ; v1(895.63,1550.37) 910.63,1550.37 924.83,1564.57 UT35.34@976.03,1564.57 ; v1(895.63,1959.37) 910.63,1959.37 924.83,1973.57 UT50.34@976.03,1973.57 ; v1(895.63,2372) 912,2372 923.2,2383.57 UT31.34@976.03,2383.57 ; v1(895.63,3194.37) 910.63,3194.37 924.83,3208.57 UT60.34@976.03,3208.57 ; v1(896.63,319.37) 911.63,319.37 925.83,333.57 UT32.34@977.03,333.57 ; v1(896.63,1140.37) 911.63,1140.37 925.83,1154.57 UT55.34@977.03,1154.57 ; v1(896.63,2781.37) 911.63,2781.37 925.83,2795.57 UT45.34@977.03,2795.57 ; v1(897.63,632.37) 914.63,632.37 930.63,648.37 ; v1(898.63,1454.37) 915.63,1454.37 930.63,1469.37 941.63,1469.37 UT35.28@942.63,1470.37 ; v1(898.63,2273.37) 916,2273.37 931.63,2289 948.63,2289 949,2289.37 UT31.28@976.03,2289.37 ; v1(898.63,3098.37) 915.63,3098.37 931.63,3114.37 UT60.28@976.03,3114.37 ; v1(899.63,2685.37) 916.63,2685.37 932.63,2701.37 UT45.28@977.03,2701.37 ; v1(901.63,915.37) 904.63,915.37 UT40.45@975.03,915.27 ; v1(902.63,1737.37) 905.63,1737.37 UT35.45@976.03,1737.27 ; v1(902.63,3381.37) 905.63,3381.37 UT60.45@976.03,3381.27 ; v1(903.63,1327.37) 906.63,1327.37 UT55.45@977.03,1327.27 ; v1(917.63,412) 917.7,412.07 UT32.39@977.03,412.07 ; UT50.28@976.03,1879.37 931.63,1879.37 915.63,1863.37 ; UT50.45@976.03,2146.27 v1@905.63,2146.37 ; UT31.45@976.03,2556.27 v1@905.63,2556.37 ; UT32.37@977.03,380.67 977.03,396.37 UT32.39@977.03,412.07 ; UT32.39@977.03,412.4 977.03,427.77 UT32.39@977.03,412.07 ; UT55.28@977.03,1060.37 932.63,1060.37 916.63,1044.37 ; v1@889.63,1643.37 v1(885.63,1643.37) v1@889.63,1643.37 ; v1@889.63,1643.37 889.83,1643.17 905.63,1643.17 ; v1@889.63,3287.37 v1(885.63,3287.37) v1@889.63,3287.37 ; v1@889.63,3287.37 889.83,3287.17 905.63,3287.17 ; 904.63,821.17 975.03,821.07 904.63,821.17 ; 905.63,1643.17 976.03,1643.07 905.63,1643.17 ; 905.63,2052.17 976.03,2052.07 905.63,2052.17 ; v1@905.63,2146.37 v1(902.63,2146.37) v1@905.63,2146.37 ; 905.63,2462.17 976.03,2462.07 905.63,2462.17 ; v1@905.63,2556.37 v1(902.63,2556.37) v1@905.63,2556.37 ; 905.63,3287.17 976.03,3287.07 905.63,3287.17 ; v1@906.63,506.37 v1(903.63,506.37) v1@906.63,506.37 ; v1@906.63,506.37 977.03,506.27 v1@906.63,506.37 ; 906.63,1233.17 977.03,1233.07 906.63,1233.17 ; 906.63,2874.17 977.03,2874.07 906.63,2874.17 ; v1@906.63,2968.37 977.03,2968.27 v1@906.63,2968.37 ; v1@906.63,2968.37 v1(903.63,2968.37) v1@906.63,2968.37 ; 915.63,1863.37 v1(898.63,1863.37) 915.63,1863.37 ; 916.63,223.37 v1(899.63,223.37) 916.63,223.37 ; 916.63,223.37 932.63,239.37 ; 916.63,1044.37 v1(897.63,1044.37) 916.63,1044.37 ; 930.63,648.37 975.03,648.37 930.63,648.37 ; 932.63,239.37 977.03,239.37 932.63,239.37 ; UT35.28@942.63,1470.37 976.03,1470.37 UT35.28@942.63,1470.37 ; UT74.14@744.13,2355.37 v1(779.63,2355.37) UT74.14@744.13,2355.37
  Bottom Layer w30: v3(893.97,109) J1.1@979.63,109